# Altium PCB Module 19 PCB Custom Grid Manager.PcbDoc (part 1 of 2)
Units mil, origin at the board's own origin, x right, y up, seen from the top; angles counter-clockwise.
Board outline 4005 x 4000 mil, 2 copper layers (Top Layer, Bottom Layer), stack 26.8 mil thick; 53 components, 70 nets, 266 pads, 11 vias.
Unrouted connection lines stored in the file: 161.
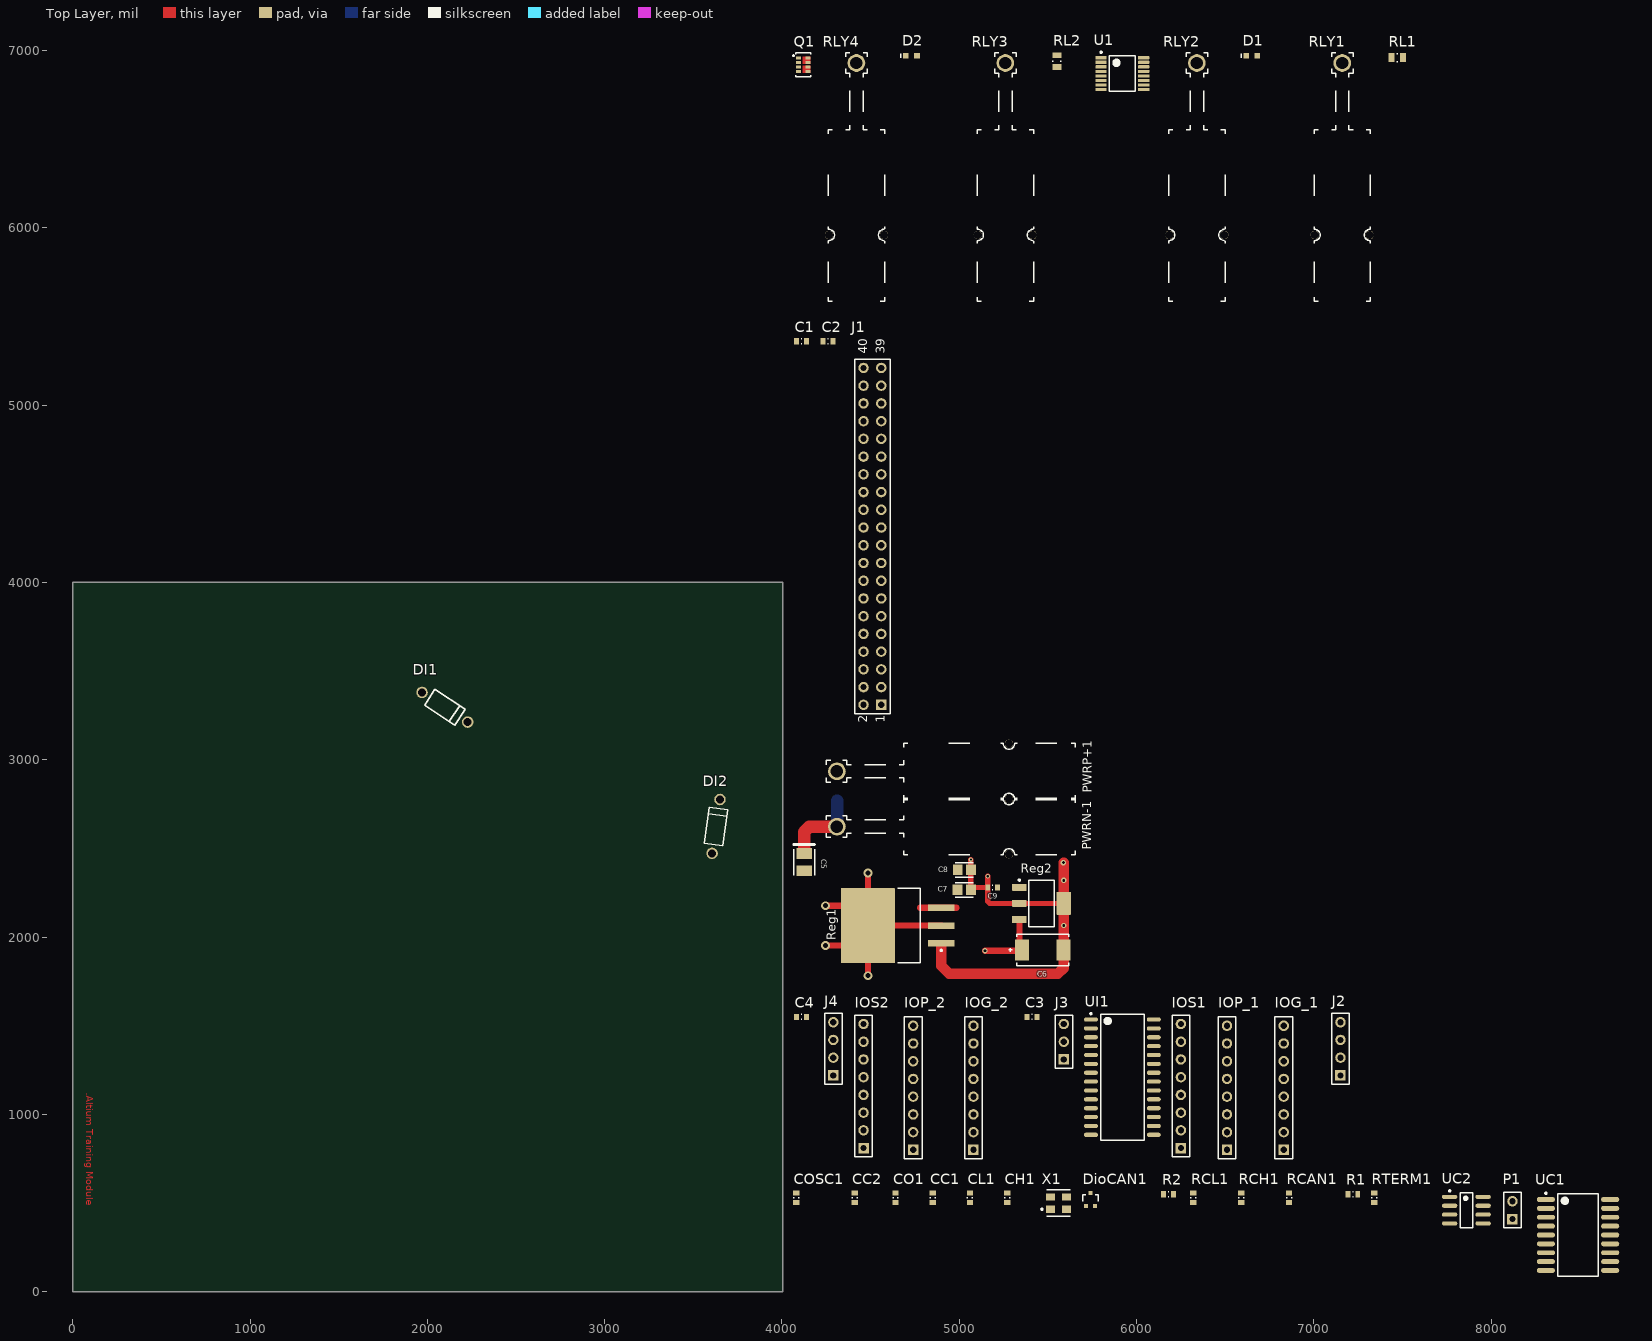
[diagram p0: Top Layer view]
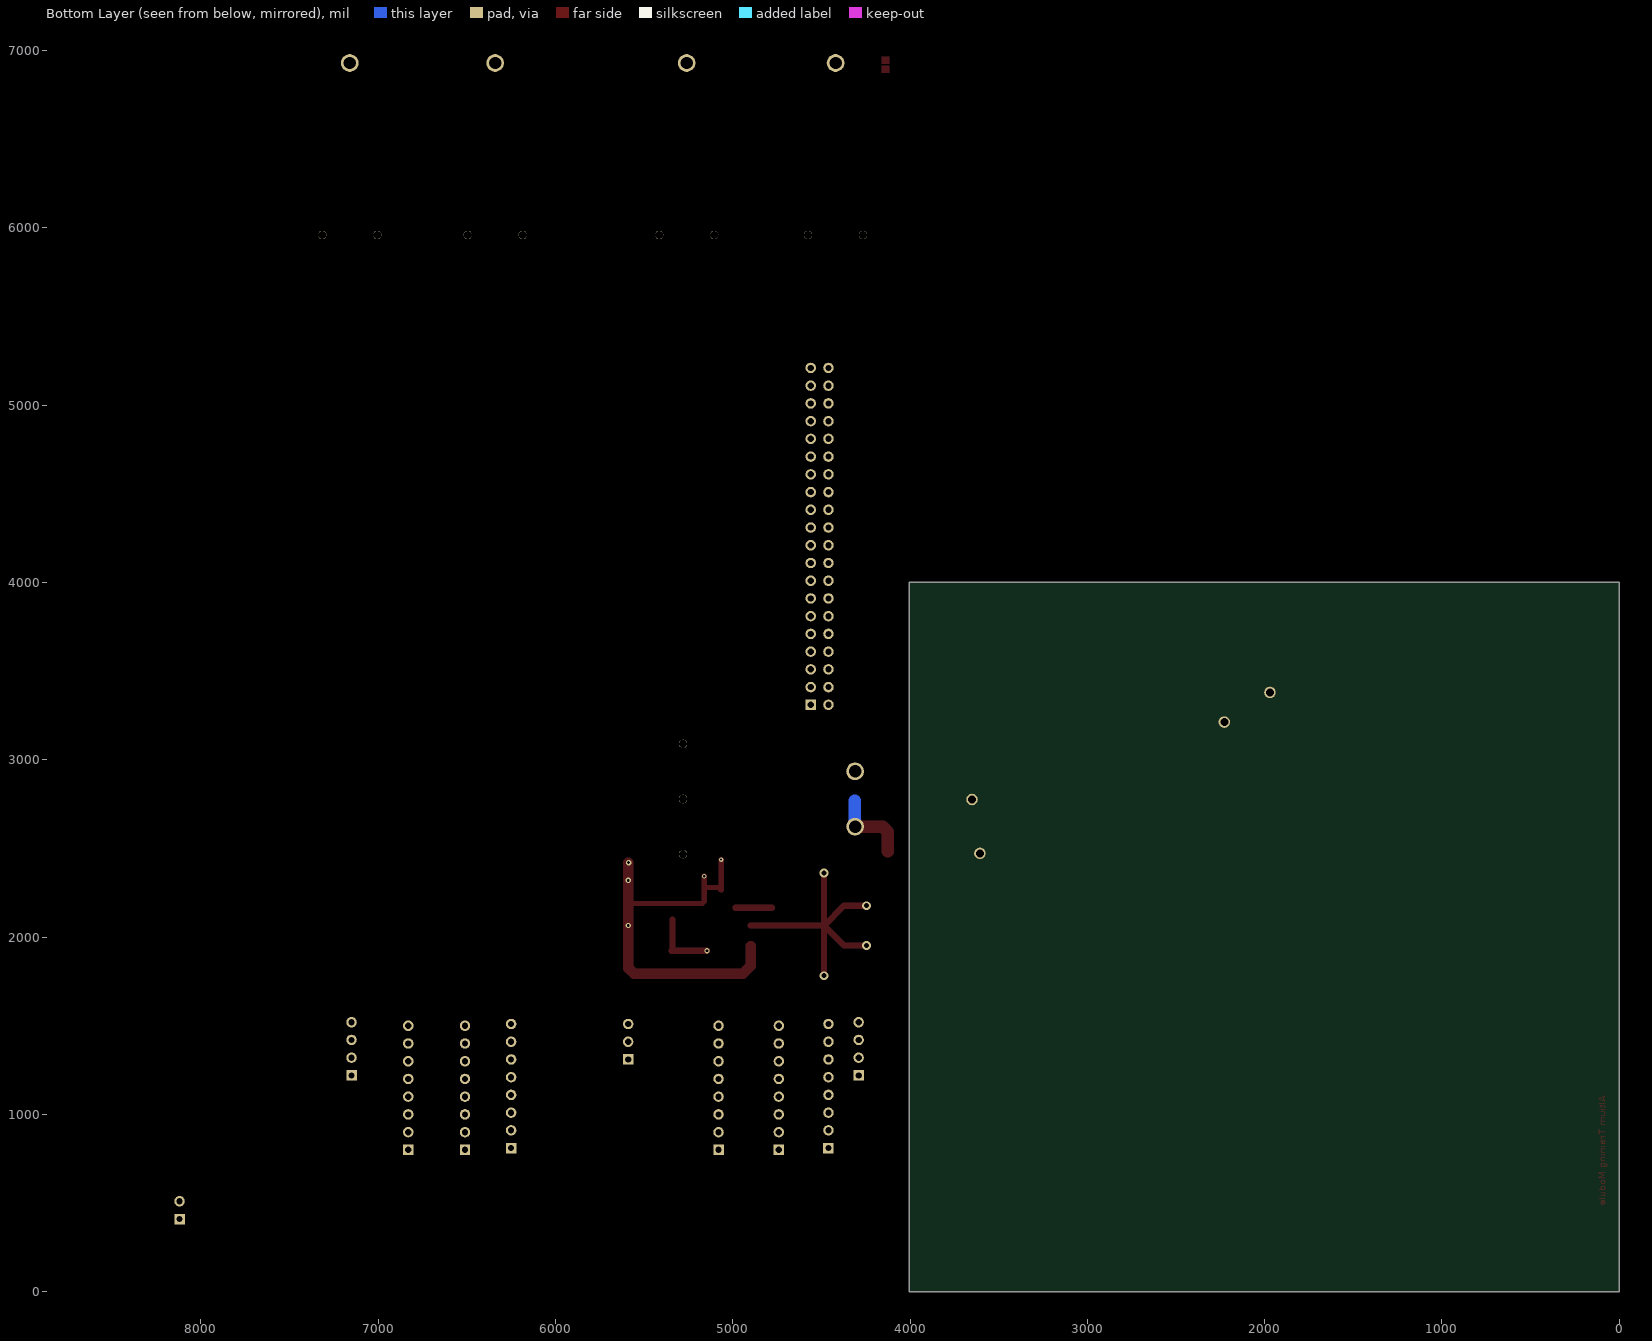
[diagram p1: Bottom Layer view, seen from below]

## Layer stack, top to bottom
Top Solder: solder mask 0.4, Solder Resist, Dk 3.5
Top Layer: signal copper 1.4
Dielectric 1: core 24, Core-038, Dk 4.6
Bottom Layer: signal copper 1.4
Bottom Solder: solder mask 0.4, Solder Resist, Dk 3.5

## Board outline
0,0 4005,0 4005,4000 0,4000

## Design rules (kind name [scope] priority, off if disabled: settings)
Clearance "Schematic Clearance Constraint" [InNetClass('CAN_Bus')] p1: gap=15 ignorepadtopadclearanceinfootprint=FALSE
Clearance [All] p2: gap=10 ignorepadtopadclearanceinfootprint=FALSE except(0: Arc-Hole Track-Hole SMDPad-Hole THPad-Hole Via-Hole Fill-Hole Poly-Hole Region-Hole Text-Hole)
PolygonConnect [All] p1: connectstyle=Relief reliefconductorwidth=10 reliefentries=4 polygonreliefangle="90 Angle" airgapwidth=10
RoutingVias [All] p1: holewidth=28 width=50 viastyle="Through Hole" minholewidth=28 minwidth=50 maxholewidth=28 maxwidth=50
SolderMaskExpansion [All] p1: expansion=4 istentingtop=FALSE
SupplyNets "Schematic Supply Nets_4" [InNet('GND')] p1: voltage=0.000
SupplyNets "Schematic Supply Nets_3" [InNet('5V')] p2: voltage=0.000
SupplyNets "Schematic Supply Nets_2" [InNet('3V3bd')] p3: voltage=0.000
SupplyNets "Schematic Supply Nets_1" [InNet('12V')] p4: voltage=0.000
SupplyNets "Schematic Supply Nets" [InNet('3V3')] p5: voltage=0.000
Width "Schematic Width Constraint_1" [InNetClass('Power')] p1: maxlimit=100 minlimit=10 preferedwidth=30
Width "Schematic Width Constraint" [InNetClass('CAN_Bus')] p2: maxlimit=30 minlimit=10 preferedwidth=20
Width [All] p3: maxlimit=10 minlimit=10 preferedwidth=10
30 further rules are at their usual default settings.

## Classes and differential pairs
net class RELAY[1..2]: RELAY1 RELAY2
net class Power: 3V3 5V GND
net class PowerNets: 3V3bd 5V 12V GND
net class DI: NetD1_1 NetD2_1
net class CAN_Bus: CAN_RXD CAN_TXD CANH CANL
component class U_Relay_IO: D1 D2 DI1 DI2 Q1 RL1 RL2 RLY1 RLY2 RLY3 RLY4 U1
component class U_Processor_Interface: C1 C2 J1
component class "U_Power Supply": C5 C6 C7 C8 C9 PWRN-1 PWRP+1 Reg1 Reg2
component class U_Digital_IO: C3 C4 IOG_1 IOG_2 IOP_1 IOP_2 IOS1 IOS2 J2 J3 J4 UI1
component class "U_CAN Interface": CC1 CC2 CH1 CL1 CO1 COSC1 DioCAN1 P1 R1 R2 RCAN1 RCH1 RCL1 RTERM1 UC1 UC2 X1

## Components (designator, comment, footprint, x,y, rotation, side; value= is the part's Value field where it differs from the comment)
C1 "Cap100nF_50V_0603" 0603C_L 4110,5360 r0 top value=100nF
C2 "Cap100nF_50V_0603" 0603C_L 4260,5360 r0 top value=100nF
C3 "Cap100nF_50V_0603" 0603C_L 5410,1550 r0 top value=100nF
C4 "Cap100nF_50V_0603" 0603C_L 4110,1550 r0 top value=100nF
C5 "TPSB106K020R1000" AVX-TPSB106K020R1000_L 4125,2423 r270 top value=10µF
C6 "TAJY336K020RNJ" FP-TAJY-MFG 5470.89,1928.01 r180 top value=33µF
C7 "CAP_Murata" CAPC2013X135X45ML10T25 5028,2266 r180 top value=10µF
C8 "CAP_Murata" CAPC2013X135X45ML10T25 5028.19,2378.94 r180 top value=10µF
C9 "Cap100nF_50V_0603" 0603C_L 5188,2280 r0 top value=100nF
CC1 "Cap0.1uF_25V_0603" 0603C_L 4850,530 r90 top value=100nF
CC2 "Cap100nF_50V_0603" 0603C_L 4410,530 r90 top value=100nF
CH1 "CAP General" 0603C_L 5270,530 r90 top value=560pF
CL1 "CAP General" 0603C_L 5060,530 r90 top value=560pF
CO1 "Cap22pF_50V_0603_Murata" 0603C_L 4640,530 r90 top value=22pF
COSC1 "Cap22pF_50V_0603_Murata" 0603C_L 4080,530 r90 top value=22pF
D1 "LED_Red0603" 0603_A 6650,6970 r0 top
D2 "LED_Red0603" 0603_A 4730,6970 r0 top
DI1 "1N4148" DO-41 2098.86,3296.37 r327.04 top
DI2 "1N4148" DO-41 3628.21,2624.15 r81.7 top
DioCAN1 "PESD1CAN" SOT323 5740,520 r90 top
IOG_1 "Header 8" HDR1X8 6830,800 r90 top
IOG_2 "Header 8" HDR1X8 5080,800 r90 top
IOP_1 "Header 8" HDR1X8 6510,800 r90 top
IOP_2 "Header 8" HDR1X8 4740,800 r90 top
IOS1 "Header 8" HDR1X8 6250,810 r90 top
IOS2 "Header 8" HDR1X8 4460,810 r90 top
J1 "Header 20X2" HDR2X20 4560,3310 r90 top
J2 "Header 4" HDR1X4 7150,1220 r90 top
J3 "Header 3" HDR1X3 5590,1310 r90 top
J4 "Header 4" HDR1X4 4290,1220 r90 top
P1 "Header 2" HDR1X2 8120,410 r90 top
PWRN-1 "Anderson-1Pin BLK_PCB_RHT" Anderson_BLK_RHT_BOT 4310,2623 r180 top
PWRP+1 "Anderson-1Pin RED_PCB_RHT" Anderson_RED_RHT_BOT 4310,2935 r180 top
Q1 "NTHD4508NT1" ONSC-CHIPFET-8-1206A-03_S2_V 4120,6920 r0 top
R1 "Res10K_0603" 0603_L 7220,550 r0 top
R2 "Res22K_0603" 0603_L 6180,550 r0 top value=22k
RCAN1 "Res4K7_0603" 0603_L 6860,530 r90 top
RCH1 "Res100_0603" 0603_L 6590,530 r90 top
RCL1 "Res100_0603" 0603_L 6320,530 r90 top
Reg1 "LM1084" KTT0003B_L 4654,2065 r180 top
Reg2 "LM3940" SOT223 5464,2190 r0 top
RL1 "Res1K_0805" 0805_L 7470,6960 r0 top
RL2 "Res1K_0805" 0805_L 5550,6940 r90 top
RLY1 "Anderson-1Pin RED_PCB_RHT" Anderson_RED_RHT_BOT 7160,6930 r90 top
RLY2 "Anderson-1Pin BLK_PCB_RHT" Anderson_BLK_RHT_BOT 6340,6930 r90 top
RLY3 "Anderson-1Pin RED_PCB_RHT" Anderson_RED_RHT_BOT 5260,6930 r90 top
RLY4 "Anderson-1Pin BLK_PCB_RHT" Anderson_BLK_RHT_BOT 4420,6930 r90 top
RTERM1 "Res130_0603" 0603_L 7340,530 r90 top
U1 "CD40109BPW" PW0016A_M 5920,6870 r0 top
UC1 "MCP2515" SOIC-SO18_M 8490,320 r0 top
UC2 "MCP2551" SOIC-SN8_N 7860,460 r0 top
UI1 "MCP23S17" SOIC-SO28_L 5920,1210 r0 top
X1 "CSTCE16M0V53-R0" FP-ABM8-MFG 5560,500 r0 top

## Footprints (in the part's own frame and the unit in brackets; to place one, negate y for a bottom-side part, rotate by r counter-clockwise, add the part's x,y. Pads: shape width x height; smd on the part's side, far side on the other; paste and mask are expansions set on the pad)
0603_A [mm] "Chip LED, 2-Leads, Body 1.6x0.8mm, IPC Medium Density"
  rect 0.8x0.8 smd: 1(-0.8,0) 2(0.8,0)
  silkscreen extent -1.5,-0.3 -1.5,0.3, body extent -0.8,-0.4 0.8,0.4, height 0.7
0603_L [mm] "0603_L"
  rect 0.7x0.9 smd: 1(-0.7,0) 2(0.7,0)
  silkscreen extent -0.05,-0.35 0.05,0.35, body extent -0.85,-0.47 0.85,0.47, height 0.6
0603C_L [mm] "0603C_L"
  rect 0.7x0.9 smd: 1(-0.7,0) 2(0.7,0)
  silkscreen extent -0.05,-0.35 0.05,0.35, body extent -0.87,-0.47 0.88,0.48, height 1
0805_L [mm] "0805_L"
  rect 0.85x1.3 smd: 1(-0.85,0) 2(0.85,0)
  silkscreen extent -0.05,-0.55 0.05,0.55, body extent -1.1,-0.67 1.1,0.68, height 0.7
Anderson_BLK_RHT_BOT [mil] "Anderson_Black_RHT_BOT"
  round 100 hole 70: 1(0,0)
  round 47 hole 47 unplated: MH1(-970,155) MH2(-970,-155)
  silkscreen extent -1344,-159 59,159, body extent -1344,-175 25,160, height 335
Anderson_RED_RHT_BOT [mil] "Anderson_RED_RHT_BOT"
  round 100 hole 70: 1(0,0)
  round 47 hole 47 unplated: MH1(-970,155) MH2(-970,-155)
  silkscreen extent -1344,-159 59,159, body extent -1344,-175 25,160, height 335
AVX-TPSB106K020R1000_L [mm] "Molded Capacitor, 2-Leads, Body 3.7x3mm, IPC High Density"
  rect 1.55x2.2 smd: 1(-1.25,0) 2(1.25,0)
  silkscreen extent -2.52,-1.5 1.85,1.5, body extent -2.07,-1.5 2.07,1.5, height 2.1
CAPC2013X135X45ML10T25 [mm] "Chip Capacitor, 2-Leads, Body 2.00x1.25mm, IPC Low Density"
  rect 1.4x1.5 smd: 1(-0.95,0) 2(0.95,0)
  silkscreen extent -1.27,-1.02 1.27,1.02, body extent -1.05,-0.67 1.05,0.67, height 1.35
DO-41 [mm] "Diode, Axial; THD, 2-Leads, Body 5.2x2.72mm, Pin Spacing 7.8mm"
  round 1.65 hole 1.15: 1(-3.9,0) 2(3.9,0)
  silkscreen extent -2.6,-1.35 2.6,1.35, body extent -4.29,-1.17 4.29,1.17, height 2.35
FP-ABM8-MFG [mm] "FP-ABM8-MFG"
  rect 1.3x1.05 smd paste+0 mask+0: 1(-1.15,-0.875) 2(1.15,-0.875) 3(1.15,0.875) 4(-1.15,0.875)
  silkscreen extent -2.5,-1.88 1.7,1.88, body extent -1.9,-1.5 1.9,1.5, height 0.25
FP-TAJY-MFG [mm]
  rect 2x3 smd paste+0 mask+0: 1(-3,0) 2(3,0)
  silkscreen extent -3.75,-2.25 4.9,2.25, body extent -4.1,-2.35 4.1,2.35, height 0.25
HDR1X2 [mm] "Connector; Header; 2 Position"
  rect 1.5x1.5 hole 0.9: 1(0,0)
  round 1.5 hole 0.9: 2(2.54,0)
  silkscreen extent -1.27,-1.27 3.81,1.27, body extent -1.27,-1.27 3.81,1.27, height 8.5
HDR1X3 [mm] "Connector; Header; 3 Position"
  rect 1.5x1.5 hole 0.9: 1(0,0)
  round 1.5 hole 0.9: 2(2.54,0) 3(5.08,0)
  silkscreen extent -1.27,-1.27 6.35,1.27, body extent -1.25,-1.29 6.37,1.25, height 9.2
HDR1X4 [mm] "Connector; Header; 4 Position"
  rect 1.5x1.5 hole 0.9: 1(0,0)
  round 1.5 hole 0.9: 2(2.54,0) 3(5.08,0) 4(7.62,0)
  silkscreen extent -1.27,-1.27 8.89,1.27, body extent -1.25,-1.25 8.91,1.29, height 9.2
HDR1X8 [mm] "Connector; Header; 8 Position"
  rect 1.5x1.5 hole 0.9: 1(0,0)
  round 1.5 hole 0.9: 2(2.54,0) 3(5.08,0) 4(7.62,0) 5(10.16,0) 6(12.7,0) 7(15.24,0) 8(17.78,0)
  silkscreen extent -1.27,-1.27 19.05,1.27, body extent -1.12,-1.25 18.91,1.25, height 8.5
HDR2X20 [mm] "Connector; Header; 20x2 Position"
  rect 1.5x1.5 hole 0.9: 1(0,0)
  round 1.5 hole 0.9: 2(0,2.54) 3(2.54,0) 4(2.54,2.54) 5(5.08,0) 6(5.08,2.54) 7(7.62,0) 8(7.62,2.54) 9(10.16,0) 10(10.16,2.54) 11(12.7,0) 12(12.7,2.54) 13(15.24,0) 14(15.24,2.54) 15(17.78,0) 16(17.78,2.54) 17(20.32,0) 18(20.32,2.54) 19(22.86,0) 20(22.86,2.54) 21(25.4,0) 22(25.4,2.54) 23(27.94,0) 24(27.94,2.54) 25(30.48,0) 26(30.48,2.54) 27(33.02,0) 28(33.02,2.54) 29(35.56,0) 30(35.56,2.54) 31(38.1,0) 32(38.1,2.54) 33(40.64,0) 34(40.64,2.54) 35(43.18,0) 36(43.18,2.54) 37(45.72,0) 38(45.72,2.54) 39(48.26,0) 40(48.26,2.54)
  silkscreen extent -1.27,-1.27 49.53,3.81, body extent -1.27,-1.27 49.53,3.81, height 10.1
KTT0003B_L [mm] "DPAK, 3-Leads, Body 10.65x9.65mm, Pitch 2.54mm, IPC High Density"
  rrect11% 3.85x0.95 smd: 1(-6.2,2.54) 2(-6.2,0) 3(-6.2,-2.54)
  rrect1% 7.7x10.7 smd: 4(4.3,0)
  silkscreen extent -6.33,-5.35 0.05,5.35, body extent -7.8,-5.08 6.5,5.08, height 4.72
ONSC-CHIPFET-8-1206A-03_S2_V [mil] "SON, 8-Leads, Body 3.025x1.625mm, Pitch 0.635mm"
  rect 25.98x17.99 smd: 1(-27.01,37.5) 2(-27.01,12.5) 3(-27.01,-12.5) 4(-27.01,-37.5) 5(27.01,-37.5) 6(27.01,-12.5) 7(27.01,12.5) 8(27.01,37.5)
  Top Layer region: -4.02,3.5 40,3.5 40,46.5 -4.02,46.5
  Top Layer region: -4.02,-46.5 40,-46.5 40,-3.5 -4.02,-3.5
  silkscreen extent -59,-67 43,67, body extent -39,-61 39,61, height 43
PW0016A_M [mm] "SOP, 16-Leads, Body 5.1x4.5mm, Pitch 0.65mm, IPC Low Density"
  rrect22% 1.6x0.45 smd: 1(-3.05,2.275) 2(-3.05,1.625) 3(-3.05,0.975) 4(-3.05,0.325) 5(-3.05,-0.325) 6(-3.05,-0.975) 7(-3.05,-1.625) 8(-3.05,-2.275) 9(3.05,-2.275) 10(3.05,-1.625) 11(3.05,-0.975) 12(3.05,-0.325) 13(3.05,0.325) 14(3.05,0.975) 15(3.05,1.625) 16(3.05,2.275)
  silkscreen extent -3.17,-2.55 1.85,3.17, body extent -3.21,-2.5 3.21,2.5, height 1
SOIC-SN8_N [mm] "SOIC, 8-Leads, Body 4.9x3.9mm, Pitch 1.27mm, IPC Medium Density"
  oval 2.2x0.6 smd: 1(-2.4,1.905) 2(-2.4,0.635) 3(-2.4,-0.635) 4(-2.4,-1.905) 5(2.4,-1.905) 6(2.4,-0.635) 7(2.4,0.635) 8(2.4,1.905)
  silkscreen extent -2.52,-2.5 0.9,2.88, body extent -3,-2.45 3,2.45, height 1.75
SOIC-SO18_M [mm] "SOIC, 18-Leads, Body 11.6x7.5mm, Pitch 1.27mm, IPC Low Density"
  oval 2.6x0.7 smd: 1(-4.6,5.08) 2(-4.6,3.81) 3(-4.6,2.54) 4(-4.6,1.27) 5(-4.6,0) 6(-4.6,-1.27) 7(-4.6,-2.54) 8(-4.6,-3.81) 9(-4.6,-5.08) 10(4.6,-5.08) 11(4.6,-3.81) 12(4.6,-2.54) 13(4.6,-1.27) 14(4.6,0) 15(4.6,1.27) 16(4.6,2.54) 17(4.6,3.81) 18(4.6,5.08)
  silkscreen extent -4.72,-5.9 2.9,6.1, body extent -5.27,-5.75 5.27,5.75, height 2.48
SOIC-SO28_L [mm] "SOIC, 28-Leads, Body 17.9x7.5mm, Pitch 1.27mm, IPC High Density"
  oval 2x0.6 smd: 1(-4.5,8.255) 2(-4.5,6.985) 3(-4.5,5.715) 4(-4.5,4.445) 5(-4.5,3.175) 6(-4.5,1.905) 7(-4.5,0.635) 8(-4.5,-0.635) 9(-4.5,-1.905) 10(-4.5,-3.175) 11(-4.5,-4.445) 12(-4.5,-5.715) 13(-4.5,-6.985) 14(-4.5,-8.255) 15(4.5,-8.255) 16(4.5,-6.985) 17(4.5,-5.715) 18(4.5,-4.445) 19(4.5,-3.175) 20(4.5,-1.905) 21(4.5,-0.635) 22(4.5,0.635) 23(4.5,1.905) 24(4.5,3.175) 25(4.5,4.445) 26(4.5,5.715) 27(4.5,6.985) 28(4.5,8.255)
  silkscreen extent -4.62,-9.05 3.1,9.23, body extent -5.15,-8.95 5.15,8.95, height 2.65
SOT223 [mm] "SOT223, 4-Leads, Body 6.7x3.7mm, Pitch 2.3mm, IPC Low Density"
  rrect10% 2.05x1 smd: 1(-3.175,2.3) 2(-3.175,0) 3(-3.175,-2.3)
  rrect5% 2.05x3.25 smd: 4(3.175,0)
  silkscreen extent -3.3,-3.35 1.85,3.47, body extent -3.5,-3.25 3.5,3.25, height 1.62
SOT323 [mm] "SOT323"
  rect 0.55x0.6 smd paste-1000 mask+0: 1(-0.925,0.65) 2(-0.925,-0.65) 3(0.925,0)
  silkscreen extent -0.28,-1.1 0.67,1.1, body extent -1.2,-1.33 1.2,1.33, height 0.25

## Part data
C1 C2 C3 C4 C9 CC2: library part CMP-00119-2, "Ceramic Capacitor, Multilayer, Ceramic, 50V, 80% +Tol, 20% -Tol, Y5V, -82/+22% TC, 0.1uF, Surface Mount, 0603", Capacitor Type=Ceramic, Case/Package=0603, Max Operating Temperature=85°C, Min Operating Temperature=-30°C, Package Shape=Rectangular, Package Style=SMTMeter, Rated DC Voltage (URdc)=50V, Temperature Characteristics Code=Y5V, Tolerance  (fill in as +-)=20%, Tolerance (fill in as +-)=80%, Dielectric Material=Ceramic, Height=0.8mm, JESD-609 Code=e3, Length=1.6mm, Mounting Technology="Surface Mount", Multilayer=Yes, Packaging="Tape and Reel", Pins=2, Reach SVHC Compliant=Yes, RoHS Compliant=Yes, Terminal Finish=Nickel, Termination=Wraparound, Voltage Rating=50V, Width=0.8mm
C5: library part CMP-00072-1, "Tantalum Capacitor, Polarized, Tantalum (dry/solid), 20V, 10% +Tol, 10% -Tol, 10uF, Surface Mount, 1210", Capacitor Type=Tantalum, Case/Package=1411, ESR (Equivalent Series Resistance)=1R, Leakage Current=2uA, Max Operating Temperature=125°C, Min Operating Temperature=-55°C, Package Shape=Rectangular, Package Style=SMTMeter, Rated DC Voltage (URdc)=20V, Tolerance  (fill in as +-)=10%, Dielectric Material=Tantalum, Height=1.9mm, JESD-609 Code=e3, Length=3.5mm, Mounting Technology="Surface Mount", Packaging="Tape and Reel", Pins=2, Polarity=Polarized, Reach SVHC Compliant=Yes, RoHS Compliant=Yes, Tan Delta=0.06, Terminal Finish=Nickel, Termination="J BEND", Tolerance (fill in as +-)=10%, Width=2.8mm
C6: library part CMP-00012-1, "Tantalum Capacitor, Polarized, Tantalum (dry/solid), 20V, 10% +Tol, 10% -Tol, 33uF, Surface Mount, 2917", Capacitor Type=Tantalum, Case/Package=2917, ESR (Equivalent Series Resistance)=600mR, Leakage Current=6.6uA, Max Operating Temperature=125°C, Min Operating Temperature=-55°C, Package Shape=Rectangular, Package Style=SMTMeter, Rated DC Voltage (URdc)=20V, Tolerance  (fill in as +-)=10%, Dielectric Material=Tantalum, Height=2mm, JESD-609 Code=e3, Length=7.3mm, Mounting Technology="Surface Mount", Packaging="Tape and Reel", Pins=2, Polarity=Polarized, Reach SVHC Compliant=Yes, RoHS Compliant=Yes, Tan Delta=0.06, Terminal Finish=Nickel, Termination="J BEND", Tolerance (fill in as +-)=10%, Width=4.3mm
C7 C8: library part CMP-00043-1, "Ceramic Capacitor, Multilayer, Ceramic, 25V, 10% +Tol, 10% -Tol, X5R, 15% TC, 10uF, Surface Mount, 0805", Capacitor Type=Ceramic, Case/Package=0805, Max Operating Temperature=85°C, Min Operating Temperature=-55°C, Tolerance=10%, Mounting Technology="Surface Mount", Pins=2, RoHS Compliant=Yes
CC1: library part CMP-00001-1, Case/Package=0603, Voltage Rating=25V
CH1 CL1: library part CMP-00212-1, "560pF 25V 0603", Case/Package=0603, Voltage Rating=25V
CO1 COSC1: library part CMP-00026-1, "Ceramic Capacitor, Multilayer, Ceramic, 50V, 5% +Tol, 5% -Tol, C0G, 30ppm/Cel TC, 0.000022uF, Surface Mount, 0603", Capacitor Type=Ceramic, Case/Package=0603, Max Operating Temperature=125°C, Min Operating Temperature=-55°C, Package Shape=Rectangular, Package Style=SMTMeter, Rated DC Voltage (URdc)=50V, Temperature Characteristics Code=C0G, Tolerance=5%, Dielectric Material=Ceramic, Height=0.8mm, JESD-609 Code=e3, Length=1.6mm, Mounting Technology="Surface Mount", Multilayer=Yes, Packaging="Tape and Reel", Pins=2, Reach SVHC Compliant=Yes, RoHS Compliant=Yes, Terminal Finish=Nickel, Termination=Wraparound, Tolerance  (fill in as +-)=5%, Tolerance (fill in as +-)=5%, Voltage Rating=50V, Width=0.8mm
D1 D2: library part CMP-007-00000-1, "Single Color LED, Red, Water Clear, 1.1mm", Case/Package=0603, Color=Red, Colour=RED, Forward Current=30mA, Forward Voltage=2V, Max Operating Temperature=85°C, Min Operating Temperature=-40°C, Lens Style="WATER CLEAR", Luminous Intensity-Nom=250mcd, Mounting Technology="Surface Mount", Optoelectronic Device Type="SINGLE COLOR LED", Overall Height=0.7mm, Pins=2, RoHS Compliant=Yes, Shape=Rectangular, Size=1.1mm, Terminal Pitch=1.6mm, Viewing Angle=140°
DI1 DI2: library part CMP-00241-2, "Rectifier Diode, 1 Phase, 1 Element, 1A, 100V V(RRM), Silicon, DO-41", Case Connection=Isolated, Case/Package=DO-41, Forward Current=1A, Forward Voltage=875mV, Max Operating Temperature=175°C, Max Surge Current=35A, Min Operating Temperature=-65°C, Package Body Material=Plastic, Package Shape=Round, Package Style="LONG FORMMeter", Peak Inverse Voltage=100V, Peak Reflow Temperature (Cel)=260°C, Time @ Peak Reflow Temperature-Max (s)=40s, Additional Feature="FREE WHEELING DIODE", Diode Element Material=SILICON, Diode Type=RECTIFIER, JEDEC-95 Code=DO-41, JESD-30 Code=O-PALF-W2, JESD-609 Code=e3, Max Output current=1A, Mounting Technology=TH, Number of Elements=1, Pins=2, Qualification Status="Not Qualified", Reach SVHC Compliant=No, Rep Pk Reverse Voltage-Max=100V, Reverse Recovery Time-Max=0.035us, RoHS Compliant=Yes, Surface Mount=No, Terminal Finish=Tin, Terminal Form=Wire, Terminal Position=AXIAL
DioCAN1: library part CMP-00244-2, "Trans Voltage Suppressor Diode, 150W, 24V V(RWM), Bidirectional, 2 Element, Silicon", Manufacturer="Nexperia USA Inc.", Design Item ID=PESD1CAN-UX, Diode Type="Fast Recovery", Source=WCT.SchLib
IOG_1 IOG_2 IOP_1 IOP_2 IOS1 IOS2: library part CMP-00206-1, "Header, 8-Pin", Design Item ID="Header 8", LatestRevisionDate=17-Jul-2002, LatestRevisionNote="Re-released for DXP Platform.", Publisher="Altium Limited", Source=WCT.SchLib
J1: library part CMP-00208-1, "Header, 20-Pin, Dual row", Design Item ID="Header 20X2", LatestRevisionDate=17-Jul-2002, LatestRevisionNote="Re-released for DXP Platform.", Publisher="Altium Limited", Source=WCT.SchLib
J2 J4: library part CMP-00175-1, "Header, 4-Pin", Design Item ID="Header 4", LatestRevisionDate=17-Jul-2002, LatestRevisionNote="Re-released for DXP Platform.", Publisher="Altium Limited", Source=WCT.SchLib
J3: library part CMP-00151-1, "Header, 3-Pin", Design Item ID="Header 3", LatestRevisionDate=17-Jul-2002, LatestRevisionNote="Re-released for DXP Platform.", Publisher="Altium Limited", Source=WCT.SchLib
P1: library part CMP-00146-1, "Header, 2-Pin", Design Item ID="Header 2", LatestRevisionDate=17-Jul-2002, LatestRevisionNote="Re-released for DXP Platform.", Publisher="Altium Limited", Source=WCT.SchLib
PWRN-1 RLY2 RLY4: library part CMP-00198-1, "Connector Accessory, Contact, Copper Alloy", Also Needed Part Nr !!!=1327G6, Current Rating=25A, Max Operating Temperature=105°C, Min Operating Temperature=-20°C, Voltage Rating=600V, Also Needed Description!!!="Blade Type Power Housing Connector", Approvals=ULV, Connector Support Type="CONNECTOR ACCESSORY", Design Use=Power, DIN Conformance=No, IEC Conformance=No, Material="Copper Alloy", MIL Conformance=No, Mounting Style="RIGHT ANGLE", Reach SVHC Compliant=Yes, RoHS Compliant=Yes, Terminal Length=0.29inch, Termination=Solder, Voltage Rating (AC)=600V, Voltage Rating (DC)=600V
PWRP+1 RLY1 RLY3: library part CMP-00162-3, "Connector Accessory, Contact, Copper Alloy", Also Needed Part Nr !!!=1327, Current Rating=25A, Max Operating Temperature=105°C, Min Operating Temperature=-20°C, Voltage Rating=600V, Also Needed Description!!!="Blade Type Power Housing Connector", Approvals=ULV, Connector Support Type="CONNECTOR ACCESSORY", Design Use=Power, DIN Conformance=No, IEC Conformance=No, Material="Copper Alloy", MIL Conformance=No, Mounting Style="RIGHT ANGLE", Reach SVHC Compliant=Yes, RoHS Compliant=Yes, Terminal Length=0.29inch, Termination=Solder, Voltage Rating (AC)=600V, Voltage Rating (DC)=600V
Q1: library part CMP-013-00000-2, "Small Signal Field-Effect Transistor", Drain Current-Max (Abs) (ID)=3.1A, Drain-source On Resistance-Max=75mR, DS Breakdown Voltage-Min=20V, Max Operating Temperature=150°C, Operating Mode="ENHANCEMENT MODE", Package Shape=Rectangular, Package Style="SMALL OUTLINEMeter", Peak Reflow Temperature (Cel)=240°C, Power Dissipation-Max (Abs)=1.13W, Pulsed Drain Current-Max (IDM)=10A, Time @ Peak Reflow Temperature-Max (s)=30s, Drain Current-Max (ID)=3.1A, FET Technology="METAL-OXIDE SEMICONDUCTOR", JESD-609 Code=e0, Moisture Sensitivity Level=1, Mounting Technology="Surface Mount", Number of Elements=2, Pins=8, Polarity/Channel Type=N-CHANNEL, Qualification Status="Not Qualified", Reach SVHC Compliant=No, RoHS Compliant=No, Surface Mount=Yes, Terminal Finish=Tin, Terminal Form="C BEND", Terminal Position=DUAL, Transistor Application=SWITCHING, Transistor Element Material=SILICON, Vgs(th) (Max) @ Id="1.2V @ 250µA"
R1: library part CMP-00098-1, Manufacturer="Panasonic Electronic Components", Manufacturer Part Number=ERJ-3GEYJ102V, Operating Temperature="-55°C ~ 155°C", Package / Case="0603 (1608 Metric)", Power (Watts)="0.1W, 1/10W", Resistance (Ohms)=10k, Supplier Device Package=0603, Temperature Coefficient=±200ppm/°C, Tolerance=5%, Category=Resistors, Composition="Thick Film", Design Item ID=Res10K_0603, Failure Rate=-, Features="Automotive AEC-Q200", Height="0.022\" (0.55mm)", Number of Terminations=2, Packaging="Cut Tape (CT)", Part Status=Active, RoHS="RoHS Compliant", Size / Dimension="0.063\" L x 0.031\" W (1.60mm x 0.80mm)", Source=WCT.SchLib
R2: library part CMP-00013-1, "RES22K 0.5% 0603", Case Code - mm=1608, Case/Package=0603, Manufacturer=Yageo, Manufacturer Part Number=RT0603DRD0722KL, Operating Temperature Range="- 55 C to + 125 C", Package / Case="0603 (1608 metric)", Power Rating="100 mW", Temperature Coefficient="25 PPM / C", Tolerance=0.5%, Voltage Rating=75V, Brand=Yageo, ComponentLink1Description=https://datasheet.ciiva.com/12810/pyu-rt-1-to-0-05-rohs-l-4-12810773.pdf, ComponentLink1URL=https://datasheet.ciiva.com/12810/pyu-rt-1-to-0-05-rohs-l-4-12810773.pdf, Design Item ID=Res22K_0603, Height="0.45 mm", Length="1.6 mm", Packaging=Reel, Pricing 1="1=0.12, 10=0.104, 25=0.0716, 50=0.0558, 100=0.0399, 250=0.0311, 500=0.0247, 1000=0.0175 (USD)", Product="Thin Film Resistors SMD", Product Category="Thin Film Resistors - SMD", RoHS=True, Series=RT, Source=WCT.SchLib, Stock 1=39729, Termination Style=SMD/SMT, Type="High Precision, High Stability", Unit Weight="0.000071 oz", Width="0.8 mm"
RCAN1: library part CMP-00016-1, Manufacturer=Yageo, Operating Temperature="-55°C ~ 155°C", Package / Case="0603 (1608 Metric)", Power (Watts)="0.1W, 1/10W", Resistance (Ohms)=4.7k, Supplier Device Package=0603, Temperature Coefficient=±25ppm/°C, Tolerance=0.5%, Category=Resistors, ComponentLink1Description=http://www.yageo.com/documents/recent/PYu-RT_1-to-0.05_RoHS_L_6.pdf, ComponentLink1URL=http://www.yageo.com/documents/recent/PYu-RT_1-to-0.05_RoHS_L_6.pdf, Composition="Thin Film", Design Item ID=Res4K7_0603, Failure Rate=-, Features="Moisture Resistant", Height="0.022\" (0.55mm)", Number of Terminations=2, Packaging="Cut Tape (CT)", Part Status=Active, Pricing 1="1=0.22, 10=0.184, 25=0.134, 100=0.0721, 250=0.05532, 500=0.04358, 1000=0.03018, 2500=0.02766 (USD)", RoHS="RoHS Compliant", Size / Dimension="0.063\" L x 0.031\" W (1.60mm x 0.80mm)", Source=WCT.SchLib, Stock 1=28874
RCH1 RCL1: library part CMP-00096-1, Manufacturer="Panasonic Electronic Components", Operating Temperature="-55°C ~ 155°C", Package / Case="0603 (1608 Metric)", Power (Watts)="0.1W, 1/10W", Resistance (Ohms)=100, Supplier Device Package=0603, Temperature Coefficient=±200ppm/°C, Tolerance=5%, Category=Resistors, ComponentLink1Description=http://industrial.panasonic.com/www-cgi/jvcr13pz.cgi?E+PZ+3+AOA0001+ERJ3GEYJ102V+7+WW, ComponentLink1URL=http://industrial.panasonic.com/www-cgi/jvcr13pz.cgi?E+PZ+3+AOA0001+ERJ3GEYJ102V+7+WW, Composition="Thick Film", Design Item ID=Res100_0603, Failure Rate=-, Features="Automotive AEC-Q200", Height="0.022\" (0.55mm)", Number of Terminations=2, Packaging="Cut Tape (CT)", Part Status=Active, Pricing 1="1=0.1, 50=0.0096, 100=0.0071, 250=0.00544, 500=0.00436, 1000=0.00321 (USD)", RoHS="RoHS Compliant", Size / Dimension="0.063\" L x 0.031\" W (1.60mm x 0.80mm)", Source=WCT.SchLib, Stock 1=1335381
Reg1: library part CMP-00188-1, "5A Low Dropout Positive Regulators, 3-pin TO-263, Pb-Free", Manufacturer="Texas Instruments", Manufacturer Part Number=LM1084IS-5.0/NOPB, PackageTopMarking=NSUZXYTTE#*LM1084*IS-5.0, PowerWise=N, Available Preview Images=2D, Code_JEDEC=MO-169-AA, ComponentLink1Description="Datasheet URL", ComponentLink1URL=http://www.ti.com/general/docs/lit/getliterature.tsp?genericPartNumber=LM1084&fileType=pdf, CompType="LDO IC", Design Item ID=LM1084, High-Reliability=Y, PackageDescription="TO-263, Molded, .400 x .390 x .180in, 3 Lead, .1in Pitch, Surface Mount", PackageReference=KTT0003B, PartNumber=LM1084IS-5.0/NOPB, PinCount=3, RoHS=Y, Source=WCT.SchLib
Reg2: library part CMP-00091-1, "1A Low Dropout Regulator for 5V to 3.3V Conversion, 4-pin SOT-223, Pb-Free", Dropout Voltage@Current (Typ)=0.5@1A/0.11@100mA, Input Voltage=7.5V, Input Voltage (Min)=4.5V, Manufacturer="Texas Instruments", Manufacturer Part Number=LM3940IMP-3.3/NOPB, Operating Temp Range="-40C to 125C", Operating Temperature Classification=Automotive, Output Current=1A, Output Voltage=3.3V, Package Type=SOT-223, PackageTopMarking=XYTT*L52B, PowerWise=N, Quiescent Current (Max)=15mA, Voltage Regulator Type=LDO, Code_IPC=SOT223-4, Code_JEDEC=TO-261-AA, ComponentLink1Description="Datasheet URL", ComponentLink1URL=http://www.ti.com/general/docs/lit/getliterature.tsp?genericPartNumber=LM3940&fileType=pdf, ComponentLink2Description=https://datasheet.ciiva.com/48433/elnatsemico-spanungsregler-ldo-lm3940-en-48433415.pdf, ComponentLink2URL=https://datasheet.ciiva.com/48433/elnatsemico-spanungsregler-ldo-lm3940-en-48433415.pdf, ComponentLink3Description=https://datasheet.ciiva.com/49046/1896170-49046286.pdf, ComponentLink3URL=https://datasheet.ciiva.com/49046/1896170-49046286.pdf, ComponentLink4Description=https://datasheet.ciiva.com/46384/1882650-46384431.pdf, ComponentLink4URL=https://datasheet.ciiva.com/46384/1882650-46384431.pdf, CompType="LDO IC", Design Item ID=LM3940IMP-3.3/NOPB, Line Regulation=40mV, Load Regulation=50mV, Mounting="Surface Mount", Number of Outputs=1, PackageDescription="Molded SOT-223, 6.50 x 3.56 x 1.6mm Body, 4 Lead, 2.3mm Pitch", PackageReference=DCY0004A, Packaging="Tape and Reel", Pin Count="3 +Tab", PinCount=4, Polarity Type=Positive, Pricing 1="1=1.49, 10=1.332, 100=1.0381, 500=0.8585 (USD)", Regulator Output Type=Fixed, RoHS=Y, Source=WCT.SchLib, Stock 1=22816, Topology=LDO
RL1 RL2: library part CMP-00124-1, Manufacturer="Panasonic Electronic Components", Manufacturer Part Number=ERJ-6GEYJ102V, Operating Temperature="-55°C ~ 155°C", Package / Case="0805 (2012 Metric)", Power (Watts)="0.125W, 1/8W", Resistance (Ohms)=1k, Supplier Device Package=0805, Temperature Coefficient=±200ppm/°C, Tolerance=5%, Category=Resistors, ComponentLink1Description=http://industrial.panasonic.com/www-cgi/jvcr13pz.cgi?E+PZ+3+AOA0001+ERJ6GEYJ102V+7+WW, ComponentLink1URL=http://industrial.panasonic.com/www-cgi/jvcr13pz.cgi?E+PZ+3+AOA0001+ERJ6GEYJ102V+7+WW, Composition="Thick Film", Design Item ID=Res1K_0805, Failure Rate=-, Features="Automotive AEC-Q200", Height="0.028\" (0.70mm)", Number of Terminations=2, Packaging="Cut Tape (CT)", Part Status=Active, Pricing 1="1=0.1, 50=0.015, 100=0.011, 250=0.0084, 500=0.00674, 1000=0.00496 (USD)", RoHS="RoHS Compliant", Size / Dimension="0.079\" L x 0.049\" W (2.00mm x 1.25mm)", Source=WCT.SchLib, Stock 1=1669380
RTERM1: library part CMP-00199-1, Manufacturer="Panasonic Electronic Components", Operating Temperature="-55°C ~ 155°C", Package / Case="0603 (1608 Metric)", Power (Watts)="0.1W, 1/10W", Resistance (Ohms)=100, Supplier Device Package=0603, Temperature Coefficient=±200ppm/°C, Tolerance=5%, Category=Resistors, ComponentLink1Description=http://industrial.panasonic.com/www-cgi/jvcr13pz.cgi?E+PZ+3+AOA0001+ERJ3GEYJ102V+7+WW, ComponentLink1URL=http://industrial.panasonic.com/www-cgi/jvcr13pz.cgi?E+PZ+3+AOA0001+ERJ3GEYJ102V+7+WW, Composition="Thick Film", Design Item ID=Res130_0603, Failure Rate=-, Features="Automotive AEC-Q200", Height="0.022\" (0.55mm)", Number of Terminations=2, Packaging="Cut Tape (CT)", Part Status=Active, Pricing 1="1=0.1, 50=0.0096, 100=0.0071, 250=0.00544, 500=0.00436, 1000=0.00321 (USD)", RoHS="RoHS Compliant", Size / Dimension="0.063\" L x 0.031\" W (1.60mm x 0.80mm)", Source=WCT.SchLib, Stock 1=1335381
U1: library part CMP-027-000000-1, "CMOS Quad Low-to-High Voltage Level Shifter, 3 to 18 V, -55 to 125 degC, 16-Pin TSSOP (PW16), RoHS, Tube", Case/Package=TSSOP, Manufacturer="Texas Instruments", Manufacturer Part Number=CD40109BPWR, Max Operating Temperature=125°C, Max Supply Voltage=18V, Min Operating Temperature=-55°C, Min Supply Voltage=3V, Nominal Supply Voltage=5V, Operating Temperature="-55°C ~ 125°C", Package / Case="16-TSSOP (0.173\", 4.40mm Width)", Package Body Material=Plastic, Package Reference=PW0016A, Package Shape=Rectangular, Package Style="SMALL OUTLINE, THIN PROFILE, SHRINK PITCHMeter", Peak Reflow Temperature (Cel)=260°C, Standard Package=1, Supplier Device Package=16-TSSOP, Temperature Grade=MILITARY, Temperature Range="-55 to 125 degC", Voltage - Supply="3 V ~ 18 V", Available Preview Images=2D, Category="Integrated Circuits (ICs)", Channels=1, ComponentLink1Description="Manufacturer URL", ComponentLink1URL=www.ti.com, ComponentLink2Description=Datasheet, ComponentLink2URL=http://www.ti.com/lit/ds/symlink/cd40109b.pdf, ComponentLink3Description="Package Specification", ComponentLink3URL=http://www.ti.com/lit/ml/mpds361/mpds361.pdf, ComponentLink4Description=https://datasheet.ciiva.com/1899/cd40109b-1899236.pdf, ComponentLink4URL=https://datasheet.ciiva.com/1899/cd40109b-1899236.pdf, ComponentLink5Description=https://datasheet.ciiva.com/1899/cd40109b-1899237.pdf, ComponentLink5URL=https://datasheet.ciiva.com/1899/cd40109b-1899237.pdf, ComponentLink6Description=https://datasheet.ciiva.com/1899/cd40109b-1899238.pdf, ComponentLink6URL=https://datasheet.ciiva.com/1899/cd40109b-1899238.pdf, ComponentLink7Description=https://datasheet.ciiva.com/15096/getdatasheetpartid-50246-15096137.pdf, ComponentLink7URL=https://datasheet.ciiva.com/15096/getdatasheetpartid-50246-15096137.pdf, ComponentLink8Description=https://datasheet.ciiva.com/41455/001015415-da-01-en-ic-quad-lo-hi-v-cd40109bpwr-tssop-16-tid-41455340.pdf, ComponentLink8URL=https://datasheet.ciiva.com/41455/001015415-da-01-en-ic-quad-lo-hi-v-cd40109bpwr-tssop-16-tid-41455340.pdf, ComponentLink9Description=https://datasheet.ciiva.com/3305/cd40109b-mil-3305133.pdf, ComponentLink9URL=https://datasheet.ciiva.com/3305/cd40109b-mil-3305133.pdf, Data Rate=-, DatasheetVersion=SCHS099B, Design Item ID=CD40109BPW, Differential - Input:Output=No/No, Dynamic Catalog=4000B, Family="Logic - Translators", Height - Seated (Max)=1.2mm, Input Type=Voltage, JESD-30 Code=R-PDSO-G16, JESD-609 Code=e4, Length=5mm, Logic Function="Level Shifter, 3-State", Logic Type="BUS DRIVER", Moisture Sensitivity Level=1, Mounting Technology="Surface Mount", Number of Bits=4, Number of Channels=4, Number of Outputs=4, Number of Outputs/Channel=1, Number of Ports=2, Other Names=296-12163-6, Output Characteristics=3-STATE, Output Polarity=True, Output Type=Voltage, PackageDescription="16-Pin Plastic Small Outline Package, Body 5 x 4.4 mm, Pitch 0.65 mm", PackageVersion=4040064-4/G, Packaging=Digi-Reel®, Packing=Tube, PartNumber=CD40109BPW, Pins=16, Pricing 1="1=0.42, 10=0.36, 100=0.2688, 500=0.2111, 1000=0.1628 (USD)", Propagation Delay="240 ns Max.", Propagation Delay (Max)=240ns, Propagation Delay (tpd)=600ns, Qualification Status="Not Qualified", Reach SVHC Compliant=Yes, RoHS=TRUE, RoHS Compliant=Yes, Series=4000B, Source=WCT.SchLib, Stock 1=11025, Surface Mount=Yes, Technology=CMOS, Terminal Finish=Nickel, Terminal Form="Gull Wing", Terminal Pitch=0.65mm, Terminal Position=DUAL, VSS="3 to 18 V", Width=4.4mm
UC1: library part CMP-00190-1, "Stand-Alone CAN Controller With SPI Interface, 18-Pin SOIC, Extended Temperature", Manufacturer=Microchip, Manufacturer Part Number=MCP2515-E/SO, Available Preview Images=2D, Code_JEDEC=MS-013, ComponentLink1Description="Manufacturer URL", ComponentLink1URL=http://www.microchip.com/, ComponentLink2Description=Datasheet, ComponentLink2URL=http://ww1.microchip.com/downloads/en/DeviceDoc/21801f.pdf, ComponentLink3Description="Package Specification", ComponentLink3URL=http://www.microchip.com/stellent/groups/techpub_sg/documents/packagingspec/en012702.pdf, DatasheetVersion="revF, Oct-2010", Design Item ID=MCP2515-E/SO, PackageDescription="18-Lead Plastic Small Outline (SO) - Wide 7.50mm Body [SOIC]", PackageReference=SOIC-SO18, PackageVersion="revBB, Aug-2009", RevisionNote="URLs added. DatasheetVersion updated.", Source=WCT.SchLib
UC2: library part CMP-00229-1, "High-Speed CAN Transceiver, 8-Pin SOIC, Extended Temperature", Manufacturer=Microchip, Manufacturer Part Number=MCP2551-E/SN, Available Preview Images=2D, Code_IPC=SOIC127P600-8, Code_JEDEC=MS-012, ComponentLink1Description="Manufacturer URL", ComponentLink1URL=http://www.microchip.com/, ComponentLink2Description=Datasheet, ComponentLink2URL=http://ww1.microchip.com/downloads/en/DeviceDoc/21667F.pdf, ComponentLink3Description="Package Specification", ComponentLink3URL=http://www.microchip.com/stellent/groups/techpub_sg/documents/packagingspec/en012702.pdf, DatasheetVersion="revF, Jul-2010", Design Item ID=MCP2551-E/SN, PackageDescription="8-Lead Plastic Small Outline (SN) - Narrow, 3.90mm Body [SOIC]", PackageReference=SOIC-SN8, PackageVersion="revBB, Aug-2009", RevisionNote="URLs added. DatasheetVersion updated.", Source=WCT.SchLib
UI1: library part CMP-00187-1, "16-Bit I/O Expander with Serial Interface, 28-Pin SOIC, Extended Temperature, Tape and Reel", Manufacturer=Microchip, Manufacturer Part Number=MCP23S17T-E/SO, Available Preview Images=2D, Code_JEDEC=MS-013, ComponentLink1Description="Manufacturer URL", ComponentLink1URL=http://www.microchip.com/, ComponentLink2Description=Datasheet, ComponentLink2URL=http://ww1.microchip.com/downloads/en/DeviceDoc/21952b.pdf, ComponentLink3Description="Package Specification", ComponentLink3URL=http://www.microchip.com/stellent/groups/techpub_sg/documents/packagingspec/en012702.pdf, DatasheetVersion="revB, Feb-2007", Design Item ID=MCP23S17T-E/SO, PackageDescription="28-Lead Plastic Small Outline (SO) - Wide 7.50mm Body [SOIC]", PackageReference=SOIC-SO28, PackageVersion="revBB, Aug-2009", RevisionNote="URLs added. Sch pin type corrected.", Source=WCT.SchLib
X1: library part CMP-00010-2, "Crystal 16MHz ±20ppm 18pF SMD-4 3.2mm x 2.5mm CSTCE16M0V53-R0 ABM8-16.000MHZ-B2-T", Case/Package=CSMD, ESR (Equivalent Series Resistance)=70, Frequency=16MHz, Frequency Stability=50ppm, Frequency Tolerance=20ppm, Load Capacitance=18pF, Max Operating Temperature=70°C, Min Operating Temperature=-20°C, Package Quantity=1000, Resistor Type=Ceramic, Series Resistance=70R, Depth=2.5mm, Design Item ID=ABM8-16.000MHZ-B2-T, Height=0.031inch, Lead Free="Lead Free", Length=3.2mm, Mount="Surface Mount", Operating Frequency=16MHz, Packaging="Tape and Reel", Pins=4, Radiation Hardening=No, REACH SVHC="No SVHC", RoHS Compliant=Yes, Series=ABM8, Source=WCT.SchLib, Termination=SMD/SMT, Tolerance=20ppm, Width=2.5mm

## Via types
v1: diameter 50, hole 28, Top Layer to Bottom Layer, 5 vias
v2: diameter 30, hole 16, Top Layer to Bottom Layer, 4 vias
v3: diameter 25, hole 12, Top Layer to Bottom Layer, 2 vias

## Nets (pads, with @x,y where several pads share a name; then routed paths per layer and width w, separated by ;. In a path a pad name is that pad's centre, name@x,y a point inside that pad or via, vN(x,y) a via of type N, cw(c..) or ccw(c..) an arc to the next point about the centre after c; other vN are vias at no path point)
3V3: C2.2 J1.1 J1.17
3V3bd: C3.2 C6.2 CC2.2 J2.3 J4.1 Reg2.3 U1.1 U1.2 U1.7 UC1.18 | length 371.5
  Top Layer w35: v2(5144.89,1923.01) C6.2@5344.9,1923.01 ; C6.2@5339,1928.01 Reg2.3
5V: C1.2 C4.2 C5.2 C9.2 CC1.2 IOP_1.1 IOP_1.2 IOP_1.3 IOP_1.4 IOP_1.5 IOP_1.6 IOP_1.7 IOP_1.8 IOP_2.1 IOP_2.2 IOP_2.3 IOP_2.4 IOP_2.5 IOP_2.6 IOP_2.7 IOP_2.8 J1.2 J1.4 Reg1.2 Reg1.4 Reg2.1 UC2.3 UI1.9 | length 1542.4
  Top Layer w35: v1(4245,1953) 4372.71,1953 4473.6,2053.89 Reg1.4 ; v1(4245,2177) 4372.71,2177 Reg1.4 ; v1(4484.71,1782.29) Reg1.4@4484.71,2042.78 ; v1(4484.71,2361.29) Reg1.4 ; Reg1.2 Reg1.4
  other v1: 4484.71,1782.29
12V: C7.2 C8.2 DI1.2 DI2.2 PWRP+1.1 Reg1.3 RL1.2 RL2.2 RLY1.1 RLY3.1 U1.16 | length 206
  Top Layer w35: 4779,2165 Reg1.3 4985,2165
\CAN_INT: J1.38 UC1.12
\IO_RESET: J1.40 UC1.17 UI1.18
AUX_CL: J3.1
AUX_DA: J3.3
C\S\: J1.24 J4.3
CAN_RXD: R1.2 R2.2 UC1.2
CAN_TXD: UC1.1 UC2.1
CANH: DioCAN1.1 P1.1 RCH1.2 RTERM1.2 UC2.7
CANL: DioCAN1.2 P1.2 RCL1.2 RTERM1.1 UC2.6
FSYNC: J3.2
GND: C1.1 C2.1 C3.1 C4.1 C5.1 C6.1 C7.1 C8.1 C9.1 CC1.1 CC2.1 CH1.2 CL1.1 CO1.1 COSC1.1 DioCAN1.3 IOG_1.1 IOG_1.2 IOG_1.3 IOG_1.4 IOG_1.5 IOG_1.6 IOG_1.7 IOG_1.8 IOG_2.1 IOG_2.2 IOG_2.3 IOG_2.4 IOG_2.5 IOG_2.6 IOG_2.7 IOG_2.8 J1.6 J1.9 J1.14 J1.20 J1.25 J1.30 J1.34 J1.39 J2.4 J4.2 PWRN-1.1 Q1.1 Q1.3 R2.1 RCAN1.1 Reg1.1 Reg2.2 Reg2.4 U1.8 U1.9 U1.15 UC1.9 UC2.2 UI1.10 UI1.15 UI1.16 UI1.17 X1.2 X1.4 | length 2732.7
  Top Layer w30: v3(5065.59,2436.72) C8.1 5065.4,2378.75 5065.4,2280 C7.1 5071.4,2272 5071.4,2280 C9.1 ; v3(5160.44,2343) C9.1 ; Reg2.4 Reg2.2 5172,2190 5160.44,2201.56 C9.1
  Top Layer w60: Reg1.1@4898.09,1948 4898.09,1837.91 4943,1793 5556.12,1793 5589,1825.88 C6.1 v2(5589,2065) Reg2.4 v2(5589,2320) v2@5589,2420
  Top Layer w70: C5.1@4125,2483 4125,2593 4155,2623 PWRN-1.1
  Bottom Layer w70: PWRN-1.1@4311,2622 PWRN-1.1 4311,2624 4311,2768
  other v2: 5587,2420
GPIO7: J1.26
GPIO13: J1.33
GPIO14: J1.8
GPIO15: J1.10
GPIO17: J1.11
GPIO18: J1.12
GPIO19: J1.35
GPIO22: J1.15
GPIO23: J1.16
GPIO24: J1.18
GPIO25: J1.22
GPIO26: J1.37
GPIO27: J1.13
ID_SC: J1.28
ID_SD: J1.27
INT: J4.4
INT1: J1.32 UI1.20
INT2: J1.36 UI1.19
IOA_0: IOS1.1 UI1.21
IOA_1: IOS1.2 UI1.22
IOA_2: IOS1.3 UI1.23
IOA_3: IOS1.4 UI1.24
IOA_4: IOS1.5 UI1.25
IOA_5: IOS1.6 UI1.26
IOA_6: IOS1.7 UI1.27
IOA_7: IOS1.8 UI1.28
IOB_0: IOS2.1 UI1.1
IOB_1: IOS2.2 UI1.2
IOB_2: IOS2.3 UI1.3
IOB_3: IOS2.4 UI1.4
IOB_4: IOS2.5 UI1.5
IOB_5: IOS2.6 UI1.6
IOB_6: IOS2.7 UI1.7
IOB_7: IOS2.8 UI1.8
IOexpand_C\S\: J1.7 UC1.16 UI1.11
NetCH1_1: CH1.1 RCH1.1
NetCL1_2: CL1.2 RCL1.1
NetD1_1: D1.1 DI1.1 Q1.5 Q1.6 RLY2.1
NetD1_2: D1.2 RL1.1
NetD2_1: D2.1 DI2.1 Q1.7 Q1.8 RLY4.1
NetD2_2: D2.2 RL2.1
NetQ1_2: Q1.2 U1.5
NetQ1_4: Q1.4 U1.4
NetR1_1: R1.1 UC2.4
NetRCAN1_2: RCAN1.2 UC2.8
OSC1: CO1.2 UC1.8 X1.1
OSC2: COSC1.2 UC1.7 X1.3
RELAY1: J1.29 U1.3
RELAY2: J1.31 U1.6
SCL1: J1.5 J2.1
SDA1: J1.3 J2.2
SPI_MISO: J1.21 UI1.14
SPI_MOSI: J1.19 UC1.14
SPI_MOSIA: UC1.15 UI1.13
SPI_SCLK: J1.23 UC1.13 UI1.12
pads on no net: PWRN-1.MH1 PWRN-1.MH2 PWRP+1.MH1 PWRP+1.MH2 RLY1.MH1 RLY1.MH2 RLY2.MH1 RLY2.MH2 RLY3.MH1 RLY3.MH2 RLY4.MH1 RLY4.MH2 U1.10 U1.11 U1.12 U1.13 U1.14 UC1.3 UC1.4 UC1.5 UC1.6 UC1.10 UC1.11 UC2.5

## Other copper
Top Layer:
  text ".Altium Training Module" at 75,1122.42 h40 r270

## Silkscreen, mask and mechanical layers (free items; w line width, h text height)
21_TITLE_BLOCK:
  drawing of 113 lines, arcs and shapes, not listed
  text "DWG. NO." at 6155.1,6215 h30
  text "REV:" at 7165.1,6215 h30
  text "6" at -4018.66,6170 h70
  text "5" at -1523,6170 h70
  text "4" at 966.34,6170 h70
  text "3" at 3473.01,6170 h70
  text "2" at 5972,6170 h70
  text "1" at 8477,6170 h70
  text ".PCB_DWG_NO" at 6370,6125 h50
  text ".PCB_REV" at 7180,6125 h50
  text "T" at -5038,6027.61 h76
  text "H" at -4994.66,6027.61 h76
  text "I" at -4944.64,6027.61 h76
  text "S" at -4924.64,6027.61 h76
  text "D" at -4859.62,6027.61 h76
  text "O" at -4809.61,6027.61 h76
  text "C" at -4754.6,6027.61 h76
  text "U" at -4704.58,6027.61 h76
  text "M" at -4654.57,6027.61 h76
  text "E" at -4596.22,6027.61 h76
  text "N" at -4549.55,6027.61 h76
  text "T" at -4501.2,6027.61 h76
  text "A" at -4437.85,6027.61 h76
  text "N" at -4391.17,6027.61 h76
  text "D" at -4341.16,6027.61 h76
  text "T" at -4272.81,6027.61 h76
  text "H" at -4229.47,6027.61 h76
  text "E" at -4179.46,6027.61 h76
  text "D" at -4114.44,6027.61 h76
  text "A" at -4064.43,6027.61 h76
  text "T" at -4017.75,6027.61 h76
  text "A" at -3976.07,6027.61 h76
  text "D" at -3909.39,6027.61 h76
  text "I" at -3859.38,6027.61 h76
  text "S" at -3841.04,6027.61 h76
  text "C" at -3794.36,6027.61 h76
  text "L" at -3744.35,6027.61 h76
  text "O" at -3706.01,6027.61 h76
  text "S" at -3650.99,6027.61 h76
  text "E" at -3604.31,6027.61 h76
  text "D" at -3557.64,6027.61 h76
  text "H" at -3489.29,6027.61 h76
  text "E" at -3439.27,6027.61 h76
  text "R" at -3392.6,6027.61 h76
  text "E" at -3344.25,6027.61 h76
  text "I" at -3297.57,6027.61 h76
  text "N" at -3277.57,6027.61 h76
  text "O" at -3209.22,6027.61 h76
  text "R" at -3154.2,6027.61 h76
  text "REVISIONS" at 7390,5995 h60
  text "H" at -5038,5947.59 h76
  text "E" at -4987.99,5947.59 h76
  text "R" at -4941.31,5947.59 h76
  text "E" at -4891.3,5947.59 h76
  text "W" at -4846.29,5947.59 h76
  text "I" at -4777.94,5947.59 h76
  text "T" at -4759.6,5947.59 h76
  text "H" at -4716.25,5947.59 h76
  text "I" at -4647.9,5947.59 h76
  text "S" at -4627.9,5947.59 h76
  text "T" at -4562.88,5947.59 h76
  text "H" at -4519.54,5947.59 h76
  text "E" at -4469.53,5947.59 h76
  text "P" at -4404.51,5947.59 h76
  text "R" at -4357.83,5947.59 h76
  text "O" at -4307.82,5947.59 h76
  text "P" at -4253.77,5947.59 h76
  text "E" at -4207.09,5947.59 h76
  text "R" at -4160.42,5947.59 h76
  text "T" at -4112.07,5947.59 h76
  text "Y" at -4068.73,5947.59 h76
  text "O" at -4003.71,5947.59 h76
  text "F" at -3950.36,5947.59 h76
  text "A" at -3887.02,5947.59 h76
  text "L" at -3840.34,5947.59 h76
  text "T" at -3803.66,5947.59 h76
  text "I" at -3760.32,5947.59 h76
  text "U" at -3740.31,5947.59 h76
  text "M" at -3690.3,5947.59 h76
  text "L" at -3613.62,5947.59 h76
  text "I" at -3575.27,5947.59 h76
  text "M" at -3555.27,5947.59 h76
  text "I" at -3498.59,5947.59 h76
  text "T" at -3478.58,5947.59 h76
  text "E" at -3435.24,5947.59 h76
  text "D" at -3388.56,5947.59 h76
  text "A" at -3320.21,5947.59 h76
  text "N" at -3273.53,5947.59 h76
  text "D" at -3223.52,5947.59 h76
  text "M" at -3153.5,5947.59 h76
  text "A" at -3095.15,5947.59 h76
  text "Y" at -3050.14,5947.59 h76
  text "ZONE" at 5805,5870 h60
  text "REV" at 6135,5870 h60
  text "DATE" at 8555,5870 h60
  text "B" at -5038,5867.57 h76
  text "E" at -4991.32,5867.57 h76
  text "F" at -4924.64,5867.57 h76
  text "R" at -4881.29,5867.57 h76
  text "E" at -4831.28,5867.57 h76
  text "E" at -4786.27,5867.57 h76
  text "L" at -4739.59,5867.57 h76
  text "Y" at -4701.25,5867.57 h76
  text "D" at -4634.57,5867.57 h76
  text "I" at -4584.56,5867.57 h76
  text "S" at -4566.22,5867.57 h76
  text "T" at -4519.54,5867.57 h76
  text "R" at -4476.89,5867.57 h76
  text "I" at -4428.54,5867.57 h76
  text "B" at -4408.54,5867.57 h76
  text "U" at -4361.86,5867.57 h76
  text "T" at -4311.85,5867.57 h76
  text "E" at -4268.5,5867.57 h76
  text "D" at -4221.82,5867.57 h76
  text "I" at -4153.47,5867.57 h76
  text "N" at -4133.47,5867.57 h76
  text "W" at -4066.79,5867.57 h76
  text "H" at -3998.44,5867.57 h76
  text "O" at -3950.09,5867.57 h76
  text "L" at -3895.08,5867.57 h76
  text "E" at -3856.73,5867.57 h76
  text "." at -3810.06,5867.57 h76
  text "N" at -3771.71,5867.57 h76
  text "O" at -3721.7,5867.57 h76
  text "R" at -3646.68,5867.57 h76
  text "I" at -3598.34,5867.57 h76
  text "G" at -3578.33,5867.57 h76
  text "H" at -3523.32,5867.57 h76
  text "T" at -3474.97,5867.57 h76
  text "S" at -3431.63,5867.57 h76
  text "A" at -3366.61,5867.57 h76
  text "R" at -3319.93,5867.57 h76
  text "E" at -3269.92,5867.57 h76
  text "DESCRIPTION" at 7150,5865 h60
  text "APPROVED" at 9060,5865 h60
  text "R" at -5038,5787.55 h76
  text "E" at -4987.99,5787.55 h76
  text "S" at -4941.31,5787.55 h76
  text "E" at -4894.63,5787.55 h76
  text "R" at -4847.95,5787.55 h76
  text "V" at -4797.94,5787.55 h76
  text "E" at -4751.26,5787.55 h76
  text "D" at -4704.58,5787.55 h76
  text "O" at -4636.23,5787.55 h76
  text "R" at -4581.22,5787.55 h76
  text "E" at -4511.2,5787.55 h76
  text "X" at -4464.53,5787.55 h76
  text "P" at -4419.51,5787.55 h76
  text "R" at -4372.84,5787.55 h76
  text "E" at -4322.82,5787.55 h76
  text "S" at -4276.15,5787.55 h76
  text "S" at -4229.47,5787.55 h76
  text "O" at -4164.45,5787.55 h76
  text "R" at -4109.44,5787.55 h76
  text "I" at -4041.09,5787.55 h76
  text "M" at -4021.08,5787.55 h76
  text "P" at -3962.74,5787.55 h76
  text "L" at -3916.06,5787.55 h76
  text "I" at -3879.38,5787.55 h76
  text "E" at -3859.38,5787.55 h76
  text "D" at -3812.7,5787.55 h76
  text "W" at -3746.02,5787.55 h76
  text "A" at -3677.67,5787.55 h76
  text "R" at -3630.99,5787.55 h76
  text "A" at -3580.97,5787.55 h76
  text "N" at -3534.3,5787.55 h76
  text "T" at -3485.95,5787.55 h76
  text "E" at -3442.61,5787.55 h76
  text "E" at -3395.93,5787.55 h76
  text "G" at -3334.68,5787.55 h76
  text "I" at -3279.66,5787.55 h76
  text "V" at -3259.66,5787.55 h76
  text "E" at -3212.98,5787.55 h76
  text "N" at -3166.3,5787.55 h76
  text "." at -3117.96,5787.55 h76
  text "A" at 6165,5735 h60
  text "ORIGINAL" at 7225,5735 h60
  text "D" at -5175,5027 h70
  text "D" at 9625,5027 h70
  text "C" at -5175,2647 h70
  text "C" at 9625,2647 h70
  text "B" at -5175,272 h70
  text "B" at 9625,272 h70
  text "DWG. NO." at 9665,-325.1 h30 r270
  text ".PCB_DWG_NO" at 9575,-540 h50 r270
  text "REV:" at 9665,-1335.1 h30 r270
  text ".PCB_REV" at 9575,-1350 h50 r270
  text "PART NO." at 3600,-1390 h45
  text ".PCB_PART_NUMBER" at 3915,-1390 h45
  text "UNLESS OTHERWISE SPECIFIED DIMENSIONS" at 3620,-1495 h45
  text "APPROVALS" at 5276,-1497.1 h45
  text "DATE" at 6136,-1497.1 h45
  text "2175 SALK AVENUE" at 8355,-1500 h45
  text "AND TOLERANCE ARE IN INCHES AND" at 3675,-1570 h45
  text "DESIGNER:" at 4956,-1577.1 h45
  text "SUITE 200" at 8355,-1590 h45
  text "APPLY TO THE FINISHED PART" at 3785,-1640 h45
  text ".PCB_DESIGNER" at 5276,-1657.1 h60
  text ".PCB_DESIGNER_APP_DATE" at 6006,-1657.1 h40
  text "CARLSBAD, CA 92008" at 8355,-1680.01 h45
  text "TOLERANCE ON:" at 4025,-1765 h45
  text "USA" at 8355,-1770 h45
  text "ENGINEER:" at 4956,-1777.1 h45
  text ".PCB_ENGINEER_APP_DATE" at 6006,-1847.1 h40
  text "2 DEC. PLACE" at 3620,-1855 h40
  text "3 DEC. PLACE" at 4075,-1855 h40
  text "ANGLES" at 4610,-1855 h40
  text ".PCB_ENGINEER" at 5276,-1857.1 h60
  text "TITLE:" at 6470,-1875 h45
  text "CHECKER:" at 4956,-1977.1 h45
  text ".PCB_2_DEC_TOL" at 3675,-2010 h60
  text ".PCB_3_DEC_TOL" at 4110,-2010 h60
  text ".PCB_ANG_TOL" at 4575,-2010 h60
  text ".PCB_CHECKER_APP_DATE" at 6004,-2051.1 h40
  text ".PCB_CHECKER" at 5276,-2057.1 h60
  text "THIRD ANGLE PROJECTION" at 2847,-2070.1 h40
  text ".Pcb_File_Name_No_Path" at 6545,-2088.33 h100
  text "A" at -5175,-2098 h70
  text "A" at 9625,-2098 h70
  text "MATERIAL:" at 3620,-2153.1 h45
  text "REFERENCE DOCUMENTS" at 5336,-2197.1 h45
  text ".Altium Training Module" at 6550,-2250 h100
  text "BOM:" at 4956,-2297.1 h45
  text "SEE NOTES" at 3986,-2352.1 h60
  text ".DOC_NO_BOM" at 5276,-2387.1 h60
  text ".Altium Training" at 6550,-2450 h80
  text "ASSY DWG:" at 4956,-2487.1 h45
  text ".DOC_NO_ASSY_DWG" at 5276,-2577.1 h60
  text "SIZE:" at 6530,-2610 h45
  text "CAGE CODE:" at 6775,-2610 h45
  text "DWG NO:" at 7775,-2610 h45
  text "REV:" at 9335,-2610 h45
  text "FAB DWG:" at 4956,-2677.1 h45
  text ".PCB_DWG_NO" at 8000,-2750 h100
  text "B" at 6570,-2755 h100
  text ".DOC_NO_FAB_DWG" at 5276,-2762.1 h60
  text ".CAGE_CODE" at 6945,-2765 h100
  text ".PCB_REV" at 9315.19,-2776.66 h100
  text "SCHEMATIC:" at 4956,-2867.1 h45
  text "Modified DATE:" at 3612,-2868.1 h45
  text "SCALE:" at 6470,-2925 h45
  text "FILE NAME:" at 7075,-2925.1 h45
  text "SHEET:" at 8815,-2925.1 h45
  text ".ModifiedDate" at 4200,-2937.1 h60
  text ".Printout_Name" at -4994,-2947 h150
  text ".DOC_NO_SCH_DWG" at 5276,-2957.1 h60
  text ".PCB_FILE_NAME_NO_PATH" at 7418,-2970.1 h60
  text ".PCB_SCALE" at 6740,-2975 h60
  text "OF" at 9265,-2975.1 h45
  text "DOC-104 REV A" at -5050,-3042.1 h20
  text "6" at -4018.66,-3130 h70
  text "5" at -1523,-3130 h70
  text "4" at 966.34,-3130 h70
  text "3" at 3473.01,-3130 h70
  text "2" at 5972,-3130 h70
  text "1" at 8477,-3130 h70
22_TITLE_BLOCK_MIRRORED:
  drawing of 113 lines, arcs and shapes, not listed
  text "REV:" at -2665.1,6215 h30
  text "DWG. NO." at -1655.1,6215 h30
  text "1" at -3977,6170 h70
  text "2" at -1472,6170 h70
  text "3" at 1026.99,6170 h70
  text "4" at 3533.66,6170 h70
  text "5" at 6023,6170 h70
  text "6" at 8518.66,6170 h70
  text ".PCB_REV" at -2680,6125 h50
  text ".PCB_DWG_NO" at -1870,6125 h50
  text "R" at 7654.2,6027.61 h76
  text "O" at 7709.22,6027.61 h76
  text "N" at 7777.57,6027.61 h76
  text "I" at 7797.57,6027.61 h76
  text "E" at 7844.25,6027.61 h76
  text "R" at 7892.59,6027.61 h76
  text "E" at 7939.27,6027.61 h76
  text "H" at 7989.29,6027.61 h76
  text "D" at 8057.64,6027.61 h76
  text "E" at 8104.31,6027.61 h76
  text "S" at 8150.99,6027.61 h76
  text "O" at 8206.01,6027.61 h76
  text "L" at 8244.35,6027.61 h76
  text "C" at 8294.36,6027.61 h76
  text "S" at 8341.04,6027.61 h76
  text "I" at 8359.38,6027.61 h76
  text "D" at 8409.39,6027.61 h76
  text "A" at 8476.07,6027.61 h76
  text "T" at 8517.75,6027.61 h76
  text "A" at 8564.43,6027.61 h76
  text "D" at 8614.44,6027.61 h76
  text "E" at 8679.45,6027.61 h76
  text "H" at 8729.47,6027.61 h76
  text "T" at 8772.81,6027.61 h76
  text "D" at 8841.16,6027.61 h76
  text "N" at 8891.17,6027.61 h76